# EAGLE board RedBot_Line_Sensor-Panel-v11a (EAGLE 6.6.0)
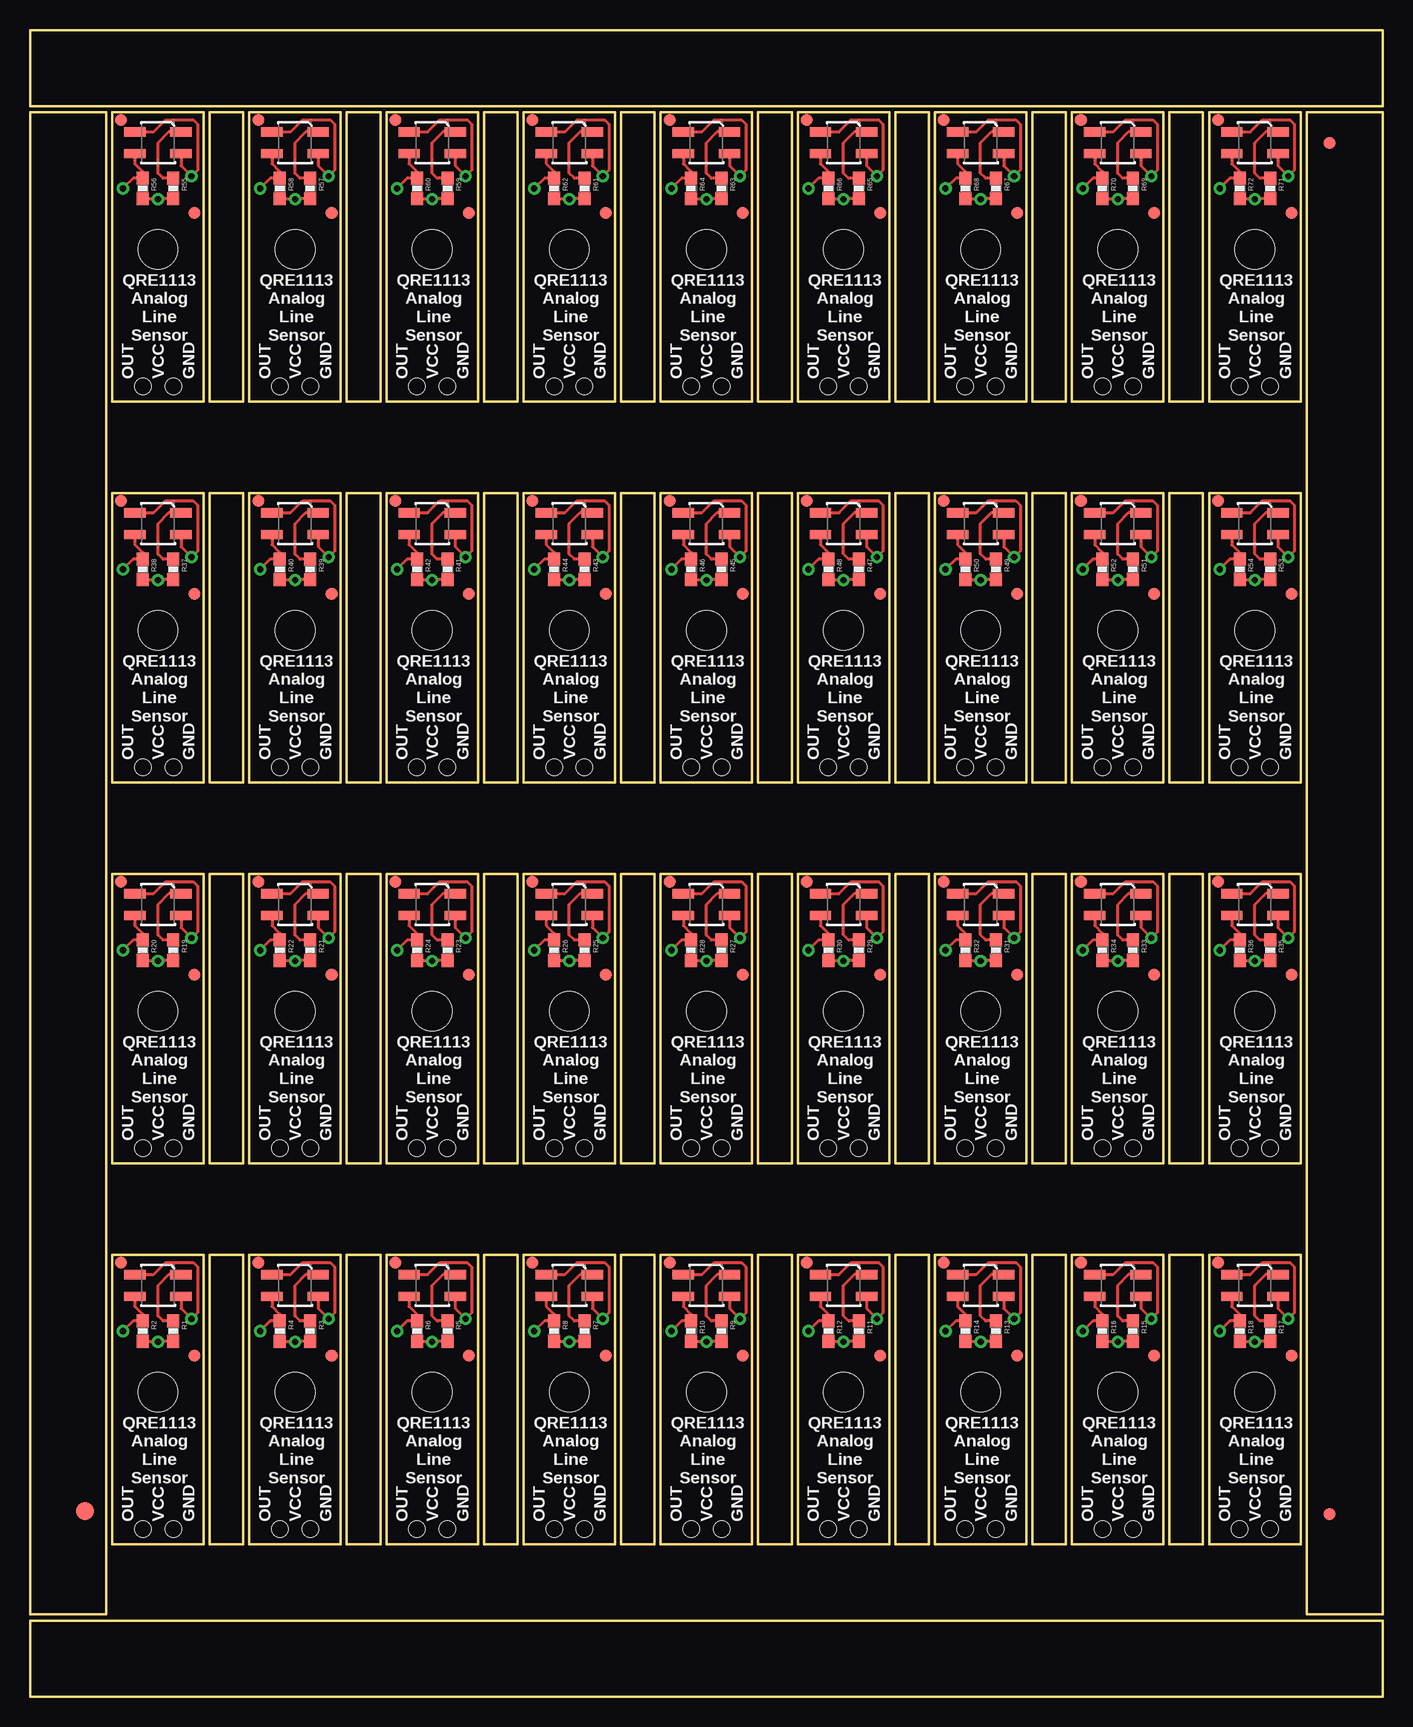
[diagram p0: board, top side]
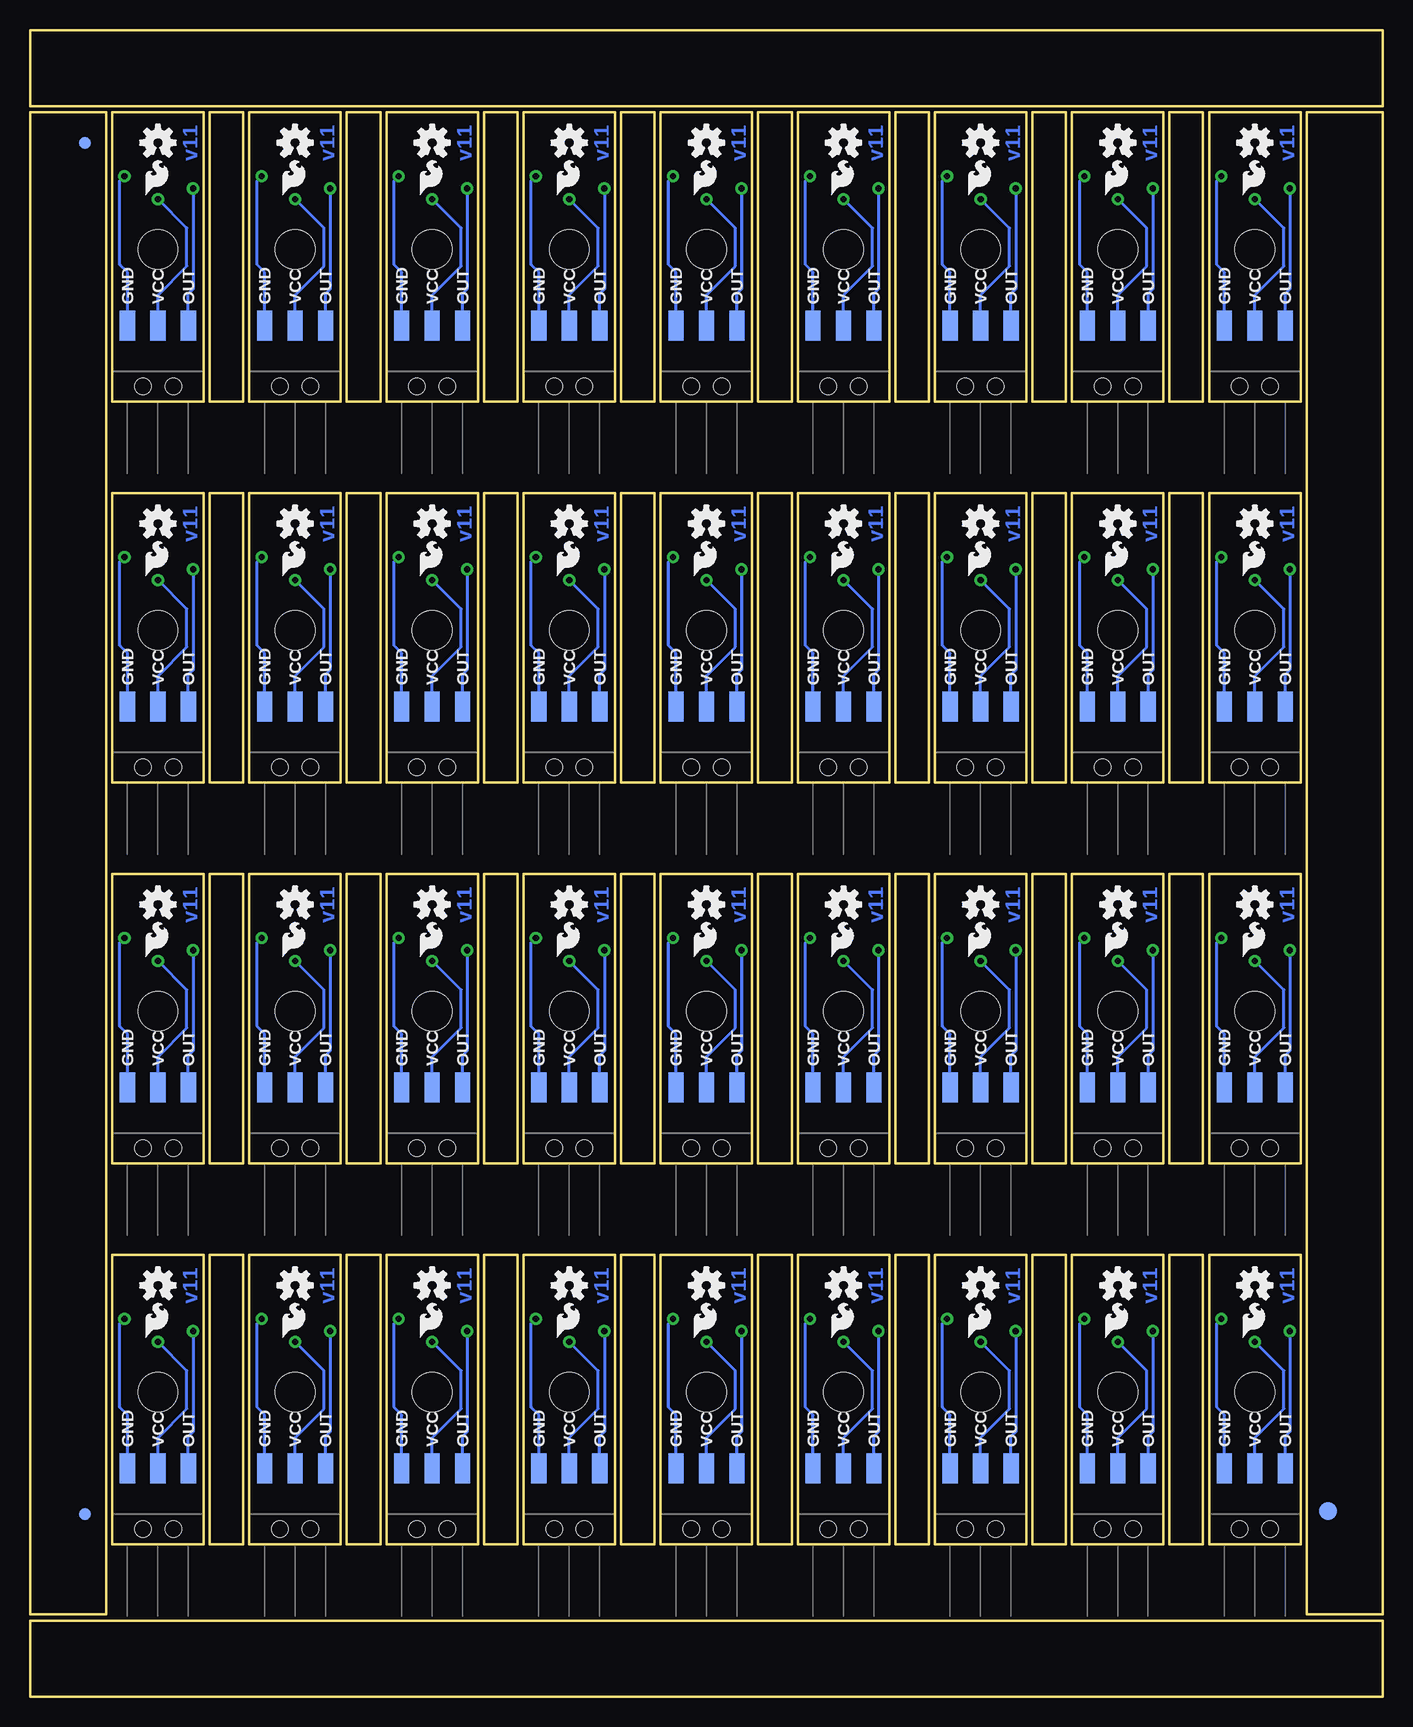
[diagram p1: board, bottom side, seen from below]

Size 112.78 x 138.94 mm. Coordinates in mm from the lower left corner, seen from the top.
Outline: 288 segments
Copper layers (1*16): Top 0.035mm / dielectric 1.5mm / Bottom 0.035mm
Design rules "SparkFun-2-layer": minimum track width 7mil, minimum drill 15mil, track to track 8mil, track to pad 8mil, pad to pad 8mil, via to via 8mil, smd to smd 8mil, copper to edge 8mil, drill to drill 8mil, minimum pad ring 12mil, minimum via ring 10mil, stop-mask expansion 4mil, vias tented up to drill 20mil, thermal gap 10mil

## Footprints (pad centres in the part's own frame; a part is rotated, then mirrored left to right if it is on the bottom)
FIDUCIAL-1.5X3 = smd 1.5 x 1.5: 1 0,0
FIDUCIAL-1X2 = smd 1 x 1: 1 0,0
1X03_SMD_RA_MALE_POST_SMALLER = smd 1.27 x 2.5: 1 -2.54,5.07; 2 0,5.07; 3 2.54,5.07 | hole 1.359: -1.27,0; 1.27,0
0603-RES = smd 1.1 x 1: 1 -0.85,0; 2 0.85,0
STAND-OFF = hole 3.302: 0,0
QRE1113-W = smd 1.778 x 0.762: 1 -1.927,-0.9; 2 1.927,-0.9; 3 1.927,0.9; 4 -1.927,0.9

## Placement (x,y rotation side)
E$1  [FIDUCIAL-1.5X3]  4.57,15.49 0 top
E$2  [FIDUCIAL-1X2]  108.33,15.24 0 top
E$3  [FIDUCIAL-1.5X3]  4.57,15.49 0 bottom
E$4  [FIDUCIAL-1X2]  108.33,129.54 180 top
E$5  [FIDUCIAL-1X2]  108.2,15.24 0 bottom
E$6  [FIDUCIAL-1X2]  108.2,129.54 0 bottom
FID1  FIDUCIAL1X2  [FIDUCIAL-1X2]  7.59,36.2 0 top
FID2  FIDUCIAL1X2  [FIDUCIAL-1X2]  13.72,28.45 0 top
FID3  FIDUCIAL1X2  [FIDUCIAL-1X2]  19.02,36.2 0 top
FID4  FIDUCIAL1X2  [FIDUCIAL-1X2]  25.15,28.45 0 top
FID5  FIDUCIAL1X2  [FIDUCIAL-1X2]  30.45,36.2 0 top
FID6  FIDUCIAL1X2  [FIDUCIAL-1X2]  36.58,28.45 0 top
FID7  FIDUCIAL1X2  [FIDUCIAL-1X2]  41.88,36.2 0 top
FID8  FIDUCIAL1X2  [FIDUCIAL-1X2]  48.01,28.45 0 top
FID9  FIDUCIAL1X2  [FIDUCIAL-1X2]  53.31,36.2 0 top
FID10  FIDUCIAL1X2  [FIDUCIAL-1X2]  59.44,28.45 0 top
FID11  FIDUCIAL1X2  [FIDUCIAL-1X2]  64.74,36.2 0 top
FID12  FIDUCIAL1X2  [FIDUCIAL-1X2]  70.87,28.45 0 top
FID13  FIDUCIAL1X2  [FIDUCIAL-1X2]  76.17,36.2 0 top
FID14  FIDUCIAL1X2  [FIDUCIAL-1X2]  82.3,28.45 0 top
FID15  FIDUCIAL1X2  [FIDUCIAL-1X2]  87.6,36.2 0 top
FID16  FIDUCIAL1X2  [FIDUCIAL-1X2]  93.73,28.45 0 top
FID17  FIDUCIAL1X2  [FIDUCIAL-1X2]  99.03,36.2 0 top
FID18  FIDUCIAL1X2  [FIDUCIAL-1X2]  105.16,28.45 0 top
FID19  FIDUCIAL1X2  [FIDUCIAL-1X2]  7.59,67.94 0 top
FID20  FIDUCIAL1X2  [FIDUCIAL-1X2]  13.72,60.2 0 top
FID21  FIDUCIAL1X2  [FIDUCIAL-1X2]  19.02,67.94 0 top
FID22  FIDUCIAL1X2  [FIDUCIAL-1X2]  25.15,60.2 0 top
FID23  FIDUCIAL1X2  [FIDUCIAL-1X2]  30.45,67.94 0 top
FID24  FIDUCIAL1X2  [FIDUCIAL-1X2]  36.58,60.2 0 top
FID25  FIDUCIAL1X2  [FIDUCIAL-1X2]  41.88,67.94 0 top
FID26  FIDUCIAL1X2  [FIDUCIAL-1X2]  48.01,60.2 0 top
FID27  FIDUCIAL1X2  [FIDUCIAL-1X2]  53.31,67.94 0 top
FID28  FIDUCIAL1X2  [FIDUCIAL-1X2]  59.44,60.2 0 top
FID29  FIDUCIAL1X2  [FIDUCIAL-1X2]  64.74,67.94 0 top
FID30  FIDUCIAL1X2  [FIDUCIAL-1X2]  70.87,60.2 0 top
FID31  FIDUCIAL1X2  [FIDUCIAL-1X2]  76.17,67.94 0 top
FID32  FIDUCIAL1X2  [FIDUCIAL-1X2]  82.3,60.2 0 top
FID33  FIDUCIAL1X2  [FIDUCIAL-1X2]  87.6,67.94 0 top
FID34  FIDUCIAL1X2  [FIDUCIAL-1X2]  93.73,60.2 0 top
FID35  FIDUCIAL1X2  [FIDUCIAL-1X2]  99.03,67.94 0 top
FID36  FIDUCIAL1X2  [FIDUCIAL-1X2]  105.16,60.2 0 top
FID37  FIDUCIAL1X2  [FIDUCIAL-1X2]  7.59,99.69 0 top
FID38  FIDUCIAL1X2  [FIDUCIAL-1X2]  13.72,91.95 0 top
FID39  FIDUCIAL1X2  [FIDUCIAL-1X2]  19.02,99.69 0 top
FID40  FIDUCIAL1X2  [FIDUCIAL-1X2]  25.15,91.95 0 top
FID41  FIDUCIAL1X2  [FIDUCIAL-1X2]  30.45,99.69 0 top
FID42  FIDUCIAL1X2  [FIDUCIAL-1X2]  36.58,91.95 0 top
FID43  FIDUCIAL1X2  [FIDUCIAL-1X2]  41.88,99.69 0 top
FID44  FIDUCIAL1X2  [FIDUCIAL-1X2]  48.01,91.95 0 top
FID45  FIDUCIAL1X2  [FIDUCIAL-1X2]  53.31,99.69 0 top
FID46  FIDUCIAL1X2  [FIDUCIAL-1X2]  59.44,91.95 0 top
FID47  FIDUCIAL1X2  [FIDUCIAL-1X2]  64.74,99.69 0 top
FID48  FIDUCIAL1X2  [FIDUCIAL-1X2]  70.87,91.95 0 top
FID49  FIDUCIAL1X2  [FIDUCIAL-1X2]  76.17,99.69 0 top
FID50  FIDUCIAL1X2  [FIDUCIAL-1X2]  82.3,91.95 0 top
FID51  FIDUCIAL1X2  [FIDUCIAL-1X2]  87.6,99.69 0 top
FID52  FIDUCIAL1X2  [FIDUCIAL-1X2]  93.73,91.95 0 top
FID53  FIDUCIAL1X2  [FIDUCIAL-1X2]  99.03,99.69 0 top
FID54  FIDUCIAL1X2  [FIDUCIAL-1X2]  105.16,91.95 0 top
FID55  FIDUCIAL1X2  [FIDUCIAL-1X2]  7.59,131.44 0 top
FID56  FIDUCIAL1X2  [FIDUCIAL-1X2]  13.72,123.7 0 top
FID57  FIDUCIAL1X2  [FIDUCIAL-1X2]  19.02,131.44 0 top
FID58  FIDUCIAL1X2  [FIDUCIAL-1X2]  25.15,123.7 0 top
FID59  FIDUCIAL1X2  [FIDUCIAL-1X2]  30.45,131.44 0 top
FID60  FIDUCIAL1X2  [FIDUCIAL-1X2]  36.58,123.7 0 top
FID61  FIDUCIAL1X2  [FIDUCIAL-1X2]  41.88,131.44 0 top
FID62  FIDUCIAL1X2  [FIDUCIAL-1X2]  48.01,123.7 0 top
FID63  FIDUCIAL1X2  [FIDUCIAL-1X2]  53.31,131.44 0 top
FID64  FIDUCIAL1X2  [FIDUCIAL-1X2]  59.44,123.7 0 top
FID65  FIDUCIAL1X2  [FIDUCIAL-1X2]  64.74,131.44 0 top
FID66  FIDUCIAL1X2  [FIDUCIAL-1X2]  70.87,123.7 0 top
FID67  FIDUCIAL1X2  [FIDUCIAL-1X2]  76.17,131.44 0 top
FID68  FIDUCIAL1X2  [FIDUCIAL-1X2]  82.3,123.7 0 top
FID69  FIDUCIAL1X2  [FIDUCIAL-1X2]  87.6,131.44 0 top
FID70  FIDUCIAL1X2  [FIDUCIAL-1X2]  93.73,123.7 0 top
FID71  FIDUCIAL1X2  [FIDUCIAL-1X2]  99.03,131.44 0 top
FID72  FIDUCIAL1X2  [FIDUCIAL-1X2]  105.16,123.7 0 top
JP1  [1X03_SMD_RA_MALE_POST_SMALLER]  10.67,13.97 0 bottom
JP2  [1X03_SMD_RA_MALE_POST_SMALLER]  22.1,13.97 0 bottom
JP3  [1X03_SMD_RA_MALE_POST_SMALLER]  33.53,13.97 0 bottom
JP4  [1X03_SMD_RA_MALE_POST_SMALLER]  44.96,13.97 0 bottom
JP5  [1X03_SMD_RA_MALE_POST_SMALLER]  56.39,13.97 0 bottom
JP6  [1X03_SMD_RA_MALE_POST_SMALLER]  67.82,13.97 0 bottom
JP7  [1X03_SMD_RA_MALE_POST_SMALLER]  79.25,13.97 0 bottom
JP8  [1X03_SMD_RA_MALE_POST_SMALLER]  90.68,13.97 0 bottom
JP9  [1X03_SMD_RA_MALE_POST_SMALLER]  102.11,13.97 0 bottom
JP10  [1X03_SMD_RA_MALE_POST_SMALLER]  10.67,45.72 0 bottom
JP11  [1X03_SMD_RA_MALE_POST_SMALLER]  22.1,45.72 0 bottom
JP12  [1X03_SMD_RA_MALE_POST_SMALLER]  33.53,45.72 0 bottom
JP13  [1X03_SMD_RA_MALE_POST_SMALLER]  44.96,45.72 0 bottom
JP14  [1X03_SMD_RA_MALE_POST_SMALLER]  56.39,45.72 0 bottom
JP15  [1X03_SMD_RA_MALE_POST_SMALLER]  67.82,45.72 0 bottom
JP16  [1X03_SMD_RA_MALE_POST_SMALLER]  79.25,45.72 0 bottom
JP17  [1X03_SMD_RA_MALE_POST_SMALLER]  90.68,45.72 0 bottom
JP18  [1X03_SMD_RA_MALE_POST_SMALLER]  102.11,45.72 0 bottom
JP19  [1X03_SMD_RA_MALE_POST_SMALLER]  10.67,77.47 0 bottom
JP20  [1X03_SMD_RA_MALE_POST_SMALLER]  22.1,77.47 0 bottom
JP21  [1X03_SMD_RA_MALE_POST_SMALLER]  33.53,77.47 0 bottom
JP22  [1X03_SMD_RA_MALE_POST_SMALLER]  44.96,77.47 0 bottom
JP23  [1X03_SMD_RA_MALE_POST_SMALLER]  56.39,77.47 0 bottom
JP24  [1X03_SMD_RA_MALE_POST_SMALLER]  67.82,77.47 0 bottom
JP25  [1X03_SMD_RA_MALE_POST_SMALLER]  79.25,77.47 0 bottom
JP26  [1X03_SMD_RA_MALE_POST_SMALLER]  90.68,77.47 0 bottom
JP27  [1X03_SMD_RA_MALE_POST_SMALLER]  102.11,77.47 0 bottom
JP28  [1X03_SMD_RA_MALE_POST_SMALLER]  10.67,109.22 0 bottom
JP29  [1X03_SMD_RA_MALE_POST_SMALLER]  22.1,109.22 0 bottom
JP30  [1X03_SMD_RA_MALE_POST_SMALLER]  33.53,109.22 0 bottom
JP31  [1X03_SMD_RA_MALE_POST_SMALLER]  44.96,109.22 0 bottom
JP32  [1X03_SMD_RA_MALE_POST_SMALLER]  56.39,109.22 0 bottom
JP33  [1X03_SMD_RA_MALE_POST_SMALLER]  67.82,109.22 0 bottom
JP34  [1X03_SMD_RA_MALE_POST_SMALLER]  79.25,109.22 0 bottom
JP35  [1X03_SMD_RA_MALE_POST_SMALLER]  90.68,109.22 0 bottom
JP36  [1X03_SMD_RA_MALE_POST_SMALLER]  102.11,109.22 0 bottom
LOGO1  OSHW-LOGOS  [OSHW-LOGO-S]  22.1,34.29 0 bottom
LOGO2  OSHW-LOGOS  [OSHW-LOGO-S]  10.67,34.29 0 bottom
LOGO3  LOGO-SFESK  [SFE-LOGO-FLAME]  11.68,29.97 0 bottom
LOGO4  LOGO-SFESK  [SFE-LOGO-FLAME]  23.11,29.97 0 bottom
LOGO5  OSHW-LOGOS  [OSHW-LOGO-S]  33.53,34.29 0 bottom
LOGO6  LOGO-SFESK  [SFE-LOGO-FLAME]  34.54,29.97 0 bottom
LOGO7  OSHW-LOGOS  [OSHW-LOGO-S]  44.96,34.29 0 bottom
LOGO8  LOGO-SFESK  [SFE-LOGO-FLAME]  45.97,29.97 0 bottom
LOGO9  OSHW-LOGOS  [OSHW-LOGO-S]  56.39,34.29 0 bottom
LOGO10  LOGO-SFESK  [SFE-LOGO-FLAME]  57.4,29.97 0 bottom
LOGO11  OSHW-LOGOS  [OSHW-LOGO-S]  67.82,34.29 0 bottom
LOGO12  LOGO-SFESK  [SFE-LOGO-FLAME]  68.83,29.97 0 bottom
LOGO13  OSHW-LOGOS  [OSHW-LOGO-S]  79.25,34.29 0 bottom
LOGO14  LOGO-SFESK  [SFE-LOGO-FLAME]  80.26,29.97 0 bottom
LOGO15  OSHW-LOGOS  [OSHW-LOGO-S]  90.68,34.29 0 bottom
LOGO16  LOGO-SFESK  [SFE-LOGO-FLAME]  91.69,29.97 0 bottom
LOGO17  OSHW-LOGOS  [OSHW-LOGO-S]  102.11,34.29 0 bottom
LOGO18  LOGO-SFESK  [SFE-LOGO-FLAME]  103.12,29.97 0 bottom
LOGO19  OSHW-LOGOS  [OSHW-LOGO-S]  10.67,66.04 0 bottom
LOGO20  LOGO-SFESK  [SFE-LOGO-FLAME]  11.68,61.72 0 bottom
LOGO21  OSHW-LOGOS  [OSHW-LOGO-S]  22.1,66.04 0 bottom
LOGO22  LOGO-SFESK  [SFE-LOGO-FLAME]  23.11,61.72 0 bottom
LOGO23  OSHW-LOGOS  [OSHW-LOGO-S]  33.53,66.04 0 bottom
LOGO24  LOGO-SFESK  [SFE-LOGO-FLAME]  34.54,61.72 0 bottom
LOGO25  OSHW-LOGOS  [OSHW-LOGO-S]  44.96,66.04 0 bottom
LOGO26  LOGO-SFESK  [SFE-LOGO-FLAME]  45.97,61.72 0 bottom
LOGO27  OSHW-LOGOS  [OSHW-LOGO-S]  56.39,66.04 0 bottom
LOGO28  LOGO-SFESK  [SFE-LOGO-FLAME]  57.4,61.72 0 bottom
LOGO29  OSHW-LOGOS  [OSHW-LOGO-S]  67.82,66.04 0 bottom
LOGO30  LOGO-SFESK  [SFE-LOGO-FLAME]  68.83,61.72 0 bottom
LOGO31  OSHW-LOGOS  [OSHW-LOGO-S]  79.25,66.04 0 bottom
LOGO32  LOGO-SFESK  [SFE-LOGO-FLAME]  80.26,61.72 0 bottom
LOGO33  OSHW-LOGOS  [OSHW-LOGO-S]  90.68,66.04 0 bottom
LOGO34  LOGO-SFESK  [SFE-LOGO-FLAME]  91.69,61.72 0 bottom
LOGO35  OSHW-LOGOS  [OSHW-LOGO-S]  102.11,66.04 0 bottom
LOGO36  LOGO-SFESK  [SFE-LOGO-FLAME]  103.12,61.72 0 bottom
LOGO37  OSHW-LOGOS  [OSHW-LOGO-S]  10.67,97.79 0 bottom
LOGO38  LOGO-SFESK  [SFE-LOGO-FLAME]  11.68,93.47 0 bottom
LOGO39  OSHW-LOGOS  [OSHW-LOGO-S]  22.1,97.79 0 bottom
LOGO40  LOGO-SFESK  [SFE-LOGO-FLAME]  23.11,93.47 0 bottom
LOGO41  OSHW-LOGOS  [OSHW-LOGO-S]  33.53,97.79 0 bottom
LOGO42  LOGO-SFESK  [SFE-LOGO-FLAME]  34.54,93.47 0 bottom
LOGO43  OSHW-LOGOS  [OSHW-LOGO-S]  44.96,97.79 0 bottom
LOGO44  LOGO-SFESK  [SFE-LOGO-FLAME]  45.97,93.47 0 bottom
LOGO45  OSHW-LOGOS  [OSHW-LOGO-S]  56.39,97.79 0 bottom
LOGO46  LOGO-SFESK  [SFE-LOGO-FLAME]  57.4,93.47 0 bottom
LOGO47  OSHW-LOGOS  [OSHW-LOGO-S]  67.82,97.79 0 bottom
LOGO48  LOGO-SFESK  [SFE-LOGO-FLAME]  68.83,93.47 0 bottom
LOGO49  OSHW-LOGOS  [OSHW-LOGO-S]  79.25,97.79 0 bottom
LOGO50  LOGO-SFESK  [SFE-LOGO-FLAME]  80.26,93.47 0 bottom
LOGO51  OSHW-LOGOS  [OSHW-LOGO-S]  90.68,97.79 0 bottom
LOGO52  LOGO-SFESK  [SFE-LOGO-FLAME]  91.69,93.47 0 bottom
LOGO53  OSHW-LOGOS  [OSHW-LOGO-S]  102.11,97.79 0 bottom
LOGO54  LOGO-SFESK  [SFE-LOGO-FLAME]  103.12,93.47 0 bottom
LOGO55  OSHW-LOGOS  [OSHW-LOGO-S]  10.67,129.54 0 bottom
LOGO56  LOGO-SFESK  [SFE-LOGO-FLAME]  11.68,125.22 0 bottom
LOGO57  OSHW-LOGOS  [OSHW-LOGO-S]  22.1,129.54 0 bottom
LOGO58  LOGO-SFESK  [SFE-LOGO-FLAME]  23.11,125.22 0 bottom
LOGO59  OSHW-LOGOS  [OSHW-LOGO-S]  33.53,129.54 0 bottom
LOGO60  LOGO-SFESK  [SFE-LOGO-FLAME]  34.54,125.22 0 bottom
LOGO61  OSHW-LOGOS  [OSHW-LOGO-S]  44.96,129.54 0 bottom
LOGO62  LOGO-SFESK  [SFE-LOGO-FLAME]  45.97,125.22 0 bottom
LOGO63  OSHW-LOGOS  [OSHW-LOGO-S]  56.39,129.54 0 bottom
LOGO64  LOGO-SFESK  [SFE-LOGO-FLAME]  57.4,125.22 0 bottom
LOGO65  OSHW-LOGOS  [OSHW-LOGO-S]  67.82,129.54 0 bottom
LOGO66  LOGO-SFESK  [SFE-LOGO-FLAME]  68.83,125.22 0 bottom
LOGO67  OSHW-LOGOS  [OSHW-LOGO-S]  79.25,129.54 0 bottom
LOGO68  LOGO-SFESK  [SFE-LOGO-FLAME]  80.26,125.22 0 bottom
LOGO69  OSHW-LOGOS  [OSHW-LOGO-S]  90.68,129.54 0 bottom
LOGO70  LOGO-SFESK  [SFE-LOGO-FLAME]  91.69,125.22 0 bottom
LOGO71  OSHW-LOGOS  [OSHW-LOGO-S]  102.11,129.54 0 bottom
LOGO72  LOGO-SFESK  [SFE-LOGO-FLAME]  103.12,125.22 0 bottom
R1  100  [0603-RES]  11.94,30.48 270 top
R2  10k  [0603-RES]  9.4,30.48 270 top
R3  100  [0603-RES]  23.37,30.48 270 top
R4  10k  [0603-RES]  20.83,30.48 270 top
R5  100  [0603-RES]  34.8,30.48 270 top
R6  10k  [0603-RES]  32.26,30.48 270 top
R7  100  [0603-RES]  46.23,30.48 270 top
R8  10k  [0603-RES]  43.69,30.48 270 top
R9  100  [0603-RES]  57.66,30.48 270 top
R10  10k  [0603-RES]  55.12,30.48 270 top
R11  100  [0603-RES]  69.09,30.48 270 top
R12  10k  [0603-RES]  66.55,30.48 270 top
R13  100  [0603-RES]  80.52,30.48 270 top
R14  10k  [0603-RES]  77.98,30.48 270 top
R15  100  [0603-RES]  91.95,30.48 270 top
R16  10k  [0603-RES]  89.41,30.48 270 top
R17  100  [0603-RES]  103.38,30.48 270 top
R18  10k  [0603-RES]  100.84,30.48 270 top
R19  100  [0603-RES]  11.94,62.23 270 top
R20  10k  [0603-RES]  9.4,62.23 270 top
R21  100  [0603-RES]  23.37,62.23 270 top
R22  10k  [0603-RES]  20.83,62.23 270 top
R23  100  [0603-RES]  34.8,62.23 270 top
R24  10k  [0603-RES]  32.26,62.23 270 top
R25  100  [0603-RES]  46.23,62.23 270 top
R26  10k  [0603-RES]  43.69,62.23 270 top
R27  100  [0603-RES]  57.66,62.23 270 top
R28  10k  [0603-RES]  55.12,62.23 270 top
R29  100  [0603-RES]  69.09,62.23 270 top
R30  10k  [0603-RES]  66.55,62.23 270 top
R31  100  [0603-RES]  80.52,62.23 270 top
R32  10k  [0603-RES]  77.98,62.23 270 top
R33  100  [0603-RES]  91.95,62.23 270 top
R34  10k  [0603-RES]  89.41,62.23 270 top
R35  100  [0603-RES]  103.38,62.23 270 top
R36  10k  [0603-RES]  100.84,62.23 270 top
R37  100  [0603-RES]  11.94,93.98 270 top
R38  10k  [0603-RES]  9.4,93.98 270 top
R39  100  [0603-RES]  23.37,93.98 270 top
R40  10k  [0603-RES]  20.83,93.98 270 top
R41  100  [0603-RES]  34.8,93.98 270 top
R42  10k  [0603-RES]  32.26,93.98 270 top
R43  100  [0603-RES]  46.23,93.98 270 top
R44  10k  [0603-RES]  43.69,93.98 270 top
R45  100  [0603-RES]  57.66,93.98 270 top
R46  10k  [0603-RES]  55.12,93.98 270 top
R47  100  [0603-RES]  69.09,93.98 270 top
R48  10k  [0603-RES]  66.55,93.98 270 top
R49  100  [0603-RES]  80.52,93.98 270 top
R50  10k  [0603-RES]  77.98,93.98 270 top
R51  100  [0603-RES]  91.95,93.98 270 top
R52  10k  [0603-RES]  89.41,93.98 270 top
R53  100  [0603-RES]  103.38,93.98 270 top
R54  10k  [0603-RES]  100.84,93.98 270 top
R55  100  [0603-RES]  11.94,125.73 270 top
R56  10k  [0603-RES]  9.4,125.73 270 top
R57  100  [0603-RES]  23.37,125.73 270 top
R58  10k  [0603-RES]  20.83,125.73 270 top
R59  100  [0603-RES]  34.8,125.73 270 top
R60  10k  [0603-RES]  32.26,125.73 270 top
R61  100  [0603-RES]  46.23,125.73 270 top
R62  10k  [0603-RES]  43.69,125.73 270 top
R63  100  [0603-RES]  57.66,125.73 270 top
R64  10k  [0603-RES]  55.12,125.73 270 top
R65  100  [0603-RES]  69.09,125.73 270 top
R66  10k  [0603-RES]  66.55,125.73 270 top
R67  100  [0603-RES]  80.52,125.73 270 top
R68  10k  [0603-RES]  77.98,125.73 270 top
R69  100  [0603-RES]  91.95,125.73 270 top
R70  10k  [0603-RES]  89.41,125.73 270 top
R71  100  [0603-RES]  103.38,125.73 270 top
R72  10k  [0603-RES]  100.84,125.73 270 top
STANDOFF1  STAND-OFF  [STAND-OFF]  10.67,25.4 0 top
STANDOFF2  STAND-OFF  [STAND-OFF]  22.1,25.4 0 top
STANDOFF3  STAND-OFF  [STAND-OFF]  33.53,25.4 0 top
STANDOFF4  STAND-OFF  [STAND-OFF]  44.96,25.4 0 top
STANDOFF5  STAND-OFF  [STAND-OFF]  56.39,25.4 0 top
STANDOFF6  STAND-OFF  [STAND-OFF]  67.82,25.4 0 top
STANDOFF7  STAND-OFF  [STAND-OFF]  79.25,25.4 0 top
STANDOFF8  STAND-OFF  [STAND-OFF]  90.68,25.4 0 top
STANDOFF9  STAND-OFF  [STAND-OFF]  102.11,25.4 0 top
STANDOFF10  STAND-OFF  [STAND-OFF]  10.67,57.15 0 top
STANDOFF11  STAND-OFF  [STAND-OFF]  22.1,57.15 0 top
STANDOFF12  STAND-OFF  [STAND-OFF]  33.53,57.15 0 top
STANDOFF13  STAND-OFF  [STAND-OFF]  44.96,57.15 0 top
STANDOFF14  STAND-OFF  [STAND-OFF]  56.39,57.15 0 top
STANDOFF15  STAND-OFF  [STAND-OFF]  67.82,57.15 0 top
STANDOFF16  STAND-OFF  [STAND-OFF]  79.25,57.15 0 top
STANDOFF17  STAND-OFF  [STAND-OFF]  90.68,57.15 0 top
STANDOFF18  STAND-OFF  [STAND-OFF]  102.11,57.15 0 top
STANDOFF19  STAND-OFF  [STAND-OFF]  10.67,88.9 0 top
STANDOFF20  STAND-OFF  [STAND-OFF]  22.1,88.9 0 top
STANDOFF21  STAND-OFF  [STAND-OFF]  33.53,88.9 0 top
STANDOFF22  STAND-OFF  [STAND-OFF]  44.96,88.9 0 top
STANDOFF23  STAND-OFF  [STAND-OFF]  56.39,88.9 0 top
STANDOFF24  STAND-OFF  [STAND-OFF]  67.82,88.9 0 top
STANDOFF25  STAND-OFF  [STAND-OFF]  79.25,88.9 0 top
STANDOFF26  STAND-OFF  [STAND-OFF]  90.68,88.9 0 top
STANDOFF27  STAND-OFF  [STAND-OFF]  102.11,88.9 0 top
STANDOFF28  STAND-OFF  [STAND-OFF]  10.67,120.65 0 top
STANDOFF29  STAND-OFF  [STAND-OFF]  22.1,120.65 0 top
STANDOFF30  STAND-OFF  [STAND-OFF]  33.53,120.65 0 top
STANDOFF31  STAND-OFF  [STAND-OFF]  44.96,120.65 0 top
STANDOFF32  STAND-OFF  [STAND-OFF]  56.39,120.65 0 top
STANDOFF33  STAND-OFF  [STAND-OFF]  67.82,120.65 0 top
STANDOFF34  STAND-OFF  [STAND-OFF]  79.25,120.65 0 top
STANDOFF35  STAND-OFF  [STAND-OFF]  90.68,120.65 0 top
STANDOFF36  STAND-OFF  [STAND-OFF]  102.11,120.65 0 top
U1  QRE1113SMD-W  [QRE1113-W]  10.67,34.29 180 top
U2  QRE1113SMD-W  [QRE1113-W]  22.1,34.29 180 top
U3  QRE1113SMD-W  [QRE1113-W]  33.53,34.29 180 top
U4  QRE1113SMD-W  [QRE1113-W]  44.96,34.29 180 top
U5  QRE1113SMD-W  [QRE1113-W]  56.39,34.29 180 top
U6  QRE1113SMD-W  [QRE1113-W]  67.82,34.29 180 top
U7  QRE1113SMD-W  [QRE1113-W]  79.25,34.29 180 top
U8  QRE1113SMD-W  [QRE1113-W]  90.68,34.29 180 top
U9  QRE1113SMD-W  [QRE1113-W]  102.11,34.29 180 top
U10  QRE1113SMD-W  [QRE1113-W]  10.67,66.04 180 top
U11  QRE1113SMD-W  [QRE1113-W]  22.1,66.04 180 top
U12  QRE1113SMD-W  [QRE1113-W]  33.53,66.04 180 top
U13  QRE1113SMD-W  [QRE1113-W]  44.96,66.04 180 top
U14  QRE1113SMD-W  [QRE1113-W]  56.39,66.04 180 top
U15  QRE1113SMD-W  [QRE1113-W]  67.82,66.04 180 top
U16  QRE1113SMD-W  [QRE1113-W]  79.25,66.04 180 top
U17  QRE1113SMD-W  [QRE1113-W]  90.68,66.04 180 top
U18  QRE1113SMD-W  [QRE1113-W]  102.11,66.04 180 top
U19  QRE1113SMD-W  [QRE1113-W]  10.67,97.79 180 top
U20  QRE1113SMD-W  [QRE1113-W]  22.1,97.79 180 top
U21  QRE1113SMD-W  [QRE1113-W]  33.53,97.79 180 top
U22  QRE1113SMD-W  [QRE1113-W]  44.96,97.79 180 top
U23  QRE1113SMD-W  [QRE1113-W]  56.39,97.79 180 top
U24  QRE1113SMD-W  [QRE1113-W]  67.82,97.79 180 top
U25  QRE1113SMD-W  [QRE1113-W]  79.25,97.79 180 top
U26  QRE1113SMD-W  [QRE1113-W]  90.68,97.79 180 top
U27  QRE1113SMD-W  [QRE1113-W]  102.11,97.79 180 top
U28  QRE1113SMD-W  [QRE1113-W]  10.67,129.54 180 top
U29  QRE1113SMD-W  [QRE1113-W]  22.1,129.54 180 top
U30  QRE1113SMD-W  [QRE1113-W]  33.53,129.54 180 top
U31  QRE1113SMD-W  [QRE1113-W]  44.96,129.54 180 top
U32  QRE1113SMD-W  [QRE1113-W]  56.39,129.54 180 top
U33  QRE1113SMD-W  [QRE1113-W]  67.82,129.54 180 top
U34  QRE1113SMD-W  [QRE1113-W]  79.25,129.54 180 top
U35  QRE1113SMD-W  [QRE1113-W]  90.68,129.54 180 top
U36  QRE1113SMD-W  [QRE1113-W]  102.11,129.54 180 top

## Library data of the parts
E$1 E$3 = SparkFun-Retired
E$2 E$4-E$6 FID1-FID72 LOGO1-LOGO72 = SparkFun-Aesthetics
JP1-JP36 = SparkFun-Connectors
R1 R3 R5 R7 R9 R11 R13 R15 R17 R19 R21 R23 R25 R27 R29 R31 R33 R35 R37 R39 R41 R43 R45 R47 R49 R51 R53 R55 R57 R59 R61 R63 R65 R67 R69 R71 = SparkFun-Resistors; PROD_ID: RES-07863
R2 R4 R6 R8 R10 R12 R14 R16 R18 R20 R22 R24 R26 R28 R30 R32 R34 R36 R38 R40 R42 R44 R46 R48 R50 R52 R54 R56 R58 R60 R62 R64 R66 R68 R70 R72 = SparkFun-Resistors; PROD_ID: RES-00824
STANDOFF1-STANDOFF36 = SparkFun-Electromechanical
U1-U36 = SparkFun-Sensors

## Nets
5V: JP1.2 R1.2 R2.2
5V1: JP2.2 R3.2 R4.2
5V2: JP3.2 R5.2 R6.2
5V3: JP4.2 R7.2 R8.2
5V4: JP5.2 R9.2 R10.2
5V5: JP6.2 R11.2 R12.2
5V6: JP7.2 R13.2 R14.2
5V7: JP8.2 R15.2 R16.2
5V8: JP9.2 R17.2 R18.2
5V9: JP10.2 R19.2 R20.2
5V10: JP11.2 R21.2 R22.2
5V11: JP12.2 R23.2 R24.2
5V12: JP13.2 R25.2 R26.2
5V13: JP14.2 R27.2 R28.2
5V14: JP15.2 R29.2 R30.2
5V15: JP16.2 R31.2 R32.2
5V16: JP17.2 R33.2 R34.2
5V17: JP18.2 R35.2 R36.2
5V18: JP19.2 R37.2 R38.2
5V19: JP20.2 R39.2 R40.2
5V20: JP21.2 R41.2 R42.2
5V21: JP22.2 R43.2 R44.2
5V22: JP23.2 R45.2 R46.2
5V23: JP24.2 R47.2 R48.2
5V24: JP25.2 R49.2 R50.2
5V25: JP26.2 R51.2 R52.2
5V26: JP27.2 R53.2 R54.2
5V27: JP28.2 R55.2 R56.2
5V28: JP29.2 R57.2 R58.2
5V29: JP30.2 R59.2 R60.2
5V30: JP31.2 R61.2 R62.2
5V31: JP32.2 R63.2 R64.2
5V32: JP33.2 R65.2 R66.2
5V33: JP34.2 R67.2 R68.2
5V34: JP35.2 R69.2 R70.2
5V35: JP36.2 R71.2 R72.2
GND: JP1.1 U1.2 U1.4
GND1: JP2.1 U2.2 U2.4
GND2: JP3.1 U3.2 U3.4
GND3: JP4.1 U4.2 U4.4
GND4: JP5.1 U5.2 U5.4
GND5: JP6.1 U6.2 U6.4
GND6: JP7.1 U7.2 U7.4
GND7: JP8.1 U8.2 U8.4
GND8: JP9.1 U9.2 U9.4
GND9: JP10.1 U10.2 U10.4
GND10: JP11.1 U11.2 U11.4
GND11: JP12.1 U12.2 U12.4
GND12: JP13.1 U13.2 U13.4
GND13: JP14.1 U14.2 U14.4
GND14: JP15.1 U15.2 U15.4
GND15: JP16.1 U16.2 U16.4
GND16: JP17.1 U17.2 U17.4
GND17: JP18.1 U18.2 U18.4
GND18: JP19.1 U19.2 U19.4
GND19: JP20.1 U20.2 U20.4
GND20: JP21.1 U21.2 U21.4
GND21: JP22.1 U22.2 U22.4
GND22: JP23.1 U23.2 U23.4
GND23: JP24.1 U24.2 U24.4
GND24: JP25.1 U25.2 U25.4
GND25: JP26.1 U26.2 U26.4
GND26: JP27.1 U27.2 U27.4
GND27: JP28.1 U28.2 U28.4
GND28: JP29.1 U29.2 U29.4
GND29: JP30.1 U30.2 U30.4
GND30: JP31.1 U31.2 U31.4
GND31: JP32.1 U32.2 U32.4
GND32: JP33.1 U33.2 U33.4
GND33: JP34.1 U34.2 U34.4
GND34: JP35.1 U35.2 U35.4
GND35: JP36.1 U36.2 U36.4
N$1: R1.1 U1.1
N$2: JP1.3 R2.1 U1.3
N$3: R3.1 U2.1
N$4: JP2.3 R4.1 U2.3
N$5: R5.1 U3.1
N$6: JP3.3 R6.1 U3.3
N$7: R7.1 U4.1
N$8: JP4.3 R8.1 U4.3
N$9: R9.1 U5.1
N$10: JP5.3 R10.1 U5.3
N$11: R11.1 U6.1
N$12: JP6.3 R12.1 U6.3
N$13: R13.1 U7.1
N$14: JP7.3 R14.1 U7.3
N$15: R15.1 U8.1
N$16: JP8.3 R16.1 U8.3
N$17: R17.1 U9.1
N$18: JP9.3 R18.1 U9.3
N$19: R19.1 U10.1
N$20: JP10.3 R20.1 U10.3
N$21: R21.1 U11.1
N$22: JP11.3 R22.1 U11.3
N$23: R23.1 U12.1
N$24: JP12.3 R24.1 U12.3
N$25: R25.1 U13.1
N$26: JP13.3 R26.1 U13.3
N$27: R27.1 U14.1
N$28: JP14.3 R28.1 U14.3
N$29: R29.1 U15.1
N$30: JP15.3 R30.1 U15.3
N$31: R31.1 U16.1
N$32: JP16.3 R32.1 U16.3
N$33: R33.1 U17.1
N$34: JP17.3 R34.1 U17.3
N$35: R35.1 U18.1
N$36: JP18.3 R36.1 U18.3
N$37: R37.1 U19.1
N$38: JP19.3 R38.1 U19.3
N$39: R39.1 U20.1
N$40: JP20.3 R40.1 U20.3
N$41: R41.1 U21.1
N$42: JP21.3 R42.1 U21.3
N$43: R43.1 U22.1
N$44: JP22.3 R44.1 U22.3
N$45: R45.1 U23.1
N$46: JP23.3 R46.1 U23.3
N$47: R47.1 U24.1
N$48: JP24.3 R48.1 U24.3
N$49: R49.1 U25.1
N$50: JP25.3 R50.1 U25.3
N$51: R51.1 U26.1
N$52: JP26.3 R52.1 U26.3
N$53: R53.1 U27.1
N$54: JP27.3 R54.1 U27.3
N$55: R55.1 U28.1
N$56: JP28.3 R56.1 U28.3
N$57: R57.1 U29.1
N$58: JP29.3 R58.1 U29.3
N$59: R59.1 U30.1
N$60: JP30.3 R60.1 U30.3
N$61: R61.1 U31.1
N$62: JP31.3 R62.1 U31.3
N$63: R63.1 U32.1
N$64: JP32.3 R64.1 U32.3
N$65: R65.1 U33.1
N$66: JP33.3 R66.1 U33.3
N$67: R67.1 U34.1
N$68: JP34.3 R68.1 U34.3
N$69: R69.1 U35.1
N$70: JP35.3 R70.1 U35.3
N$71: R71.1 U36.1
N$72: JP36.3 R72.1 U36.3

## Tracks (layer width: path | path; a pad name or v marks a point on that pad's centre or on a via)
5V  (via drill 0.51)
  Top 0.254: R2.2 10.63,29.63 v10.67,29.59 10.71,29.63 R1.2
  Bottom 0.254: JP1.2 10.67,21.59 8.26,24 8.26,27.18 v10.67,29.59
5V1  (via drill 0.51)
  Top 0.254: R4.2 22.06,29.63 v22.1,29.59 22.14,29.63 R3.2
  Bottom 0.254: JP2.2 22.1,21.59 19.68,24 19.68,27.18 v22.1,29.59
5V2  (via drill 0.51)
  Top 0.254: R6.2 33.49,29.63 v33.53,29.59 33.57,29.63 R5.2
  Bottom 0.254: JP3.2 33.53,21.59 31.11,24 31.11,27.18 v33.53,29.59
5V3  (via drill 0.51)
  Top 0.254: R8.2 44.92,29.63 v44.96,29.59 45,29.63 R7.2
  Bottom 0.254: JP4.2 44.96,21.59 42.55,24 42.55,27.18 v44.96,29.59
5V4  (via drill 0.51)
  Top 0.254: R10.2 56.35,29.63 v56.39,29.59 56.43,29.63 R9.2
  Bottom 0.254: JP5.2 56.39,21.59 53.98,24 53.98,27.18 v56.39,29.59
5V5  (via drill 0.51)
  Top 0.254: R12.2 67.78,29.63 v67.82,29.59 67.86,29.63 R11.2
  Bottom 0.254: JP6.2 67.82,21.59 65.41,24 65.41,27.18 v67.82,29.59
5V6  (via drill 0.51)
  Top 0.254: R14.2 79.21,29.63 v79.25,29.59 79.29,29.63 R13.2
  Bottom 0.254: JP7.2 79.25,21.59 76.83,24 76.83,27.18 v79.25,29.59
5V7  (via drill 0.51)
  Top 0.254: R16.2 90.64,29.63 v90.68,29.59 90.72,29.63 R15.2
  Bottom 0.254: JP8.2 90.68,21.59 88.27,24 88.27,27.18 v90.68,29.59
5V8  (via drill 0.51)
  Top 0.254: R18.2 102.07,29.63 v102.11,29.59 102.15,29.63 R17.2
  Bottom 0.254: JP9.2 102.11,21.59 99.69,24 99.69,27.18 v102.11,29.59
5V9  (via drill 0.51)
  Top 0.254: R20.2 10.63,61.38 v10.67,61.34 10.71,61.38 R19.2
  Bottom 0.254: JP10.2 10.67,53.34 8.26,55.75 8.26,58.93 v10.67,61.34
5V10  (via drill 0.51)
  Top 0.254: R22.2 22.06,61.38 v22.1,61.34 22.14,61.38 R21.2
  Bottom 0.254: JP11.2 22.1,53.34 19.68,55.75 19.68,58.93 v22.1,61.34
5V11  (via drill 0.51)
  Top 0.254: R24.2 33.49,61.38 v33.53,61.34 33.57,61.38 R23.2
  Bottom 0.254: JP12.2 33.53,53.34 31.11,55.75 31.11,58.93 v33.53,61.34
5V12  (via drill 0.51)
  Top 0.254: R26.2 44.92,61.38 v44.96,61.34 45,61.38 R25.2
  Bottom 0.254: JP13.2 44.96,53.34 42.55,55.75 42.55,58.93 v44.96,61.34
5V13  (via drill 0.51)
  Top 0.254: R28.2 56.35,61.38 v56.39,61.34 56.43,61.38 R27.2
  Bottom 0.254: JP14.2 56.39,53.34 53.98,55.75 53.98,58.93 v56.39,61.34
5V14  (via drill 0.51)
  Top 0.254: R30.2 67.78,61.38 v67.82,61.34 67.86,61.38 R29.2
  Bottom 0.254: JP15.2 67.82,53.34 65.41,55.75 65.41,58.93 v67.82,61.34
5V15  (via drill 0.51)
  Top 0.254: R32.2 79.21,61.38 v79.25,61.34 79.29,61.38 R31.2
  Bottom 0.254: JP16.2 79.25,53.34 76.83,55.75 76.83,58.93 v79.25,61.34
5V16  (via drill 0.51)
  Top 0.254: R34.2 90.64,61.38 v90.68,61.34 90.72,61.38 R33.2
  Bottom 0.254: JP17.2 90.68,53.34 88.27,55.75 88.27,58.93 v90.68,61.34
5V17  (via drill 0.51)
  Top 0.254: R36.2 102.07,61.38 v102.11,61.34 102.15,61.38 R35.2
  Bottom 0.254: JP18.2 102.11,53.34 99.69,55.75 99.69,58.93 v102.11,61.34
5V18  (via drill 0.51)
  Top 0.254: R38.2 10.63,93.13 v10.67,93.09 10.71,93.13 R37.2
  Bottom 0.254: JP19.2 10.67,85.09 8.26,87.5 8.26,90.68 v10.67,93.09
5V19  (via drill 0.51)
  Top 0.254: R40.2 22.06,93.13 v22.1,93.09 22.14,93.13 R39.2
  Bottom 0.254: JP20.2 22.1,85.09 19.68,87.5 19.68,90.68 v22.1,93.09
5V20  (via drill 0.51)
  Top 0.254: R42.2 33.49,93.13 v33.53,93.09 33.57,93.13 R41.2
  Bottom 0.254: JP21.2 33.53,85.09 31.11,87.5 31.11,90.68 v33.53,93.09
5V21  (via drill 0.51)
  Top 0.254: R44.2 44.92,93.13 v44.96,93.09 45,93.13 R43.2
  Bottom 0.254: JP22.2 44.96,85.09 42.55,87.5 42.55,90.68 v44.96,93.09
5V22  (via drill 0.51)
  Top 0.254: R46.2 56.35,93.13 v56.39,93.09 56.43,93.13 R45.2
  Bottom 0.254: JP23.2 56.39,85.09 53.98,87.5 53.98,90.68 v56.39,93.09
5V23  (via drill 0.51)
  Top 0.254: R48.2 67.78,93.13 v67.82,93.09 67.86,93.13 R47.2
  Bottom 0.254: JP24.2 67.82,85.09 65.41,87.5 65.41,90.68 v67.82,93.09
5V24  (via drill 0.51)
  Top 0.254: R50.2 79.21,93.13 v79.25,93.09 79.29,93.13 R49.2
  Bottom 0.254: JP25.2 79.25,85.09 76.83,87.5 76.83,90.68 v79.25,93.09
5V25  (via drill 0.51)
  Top 0.254: R52.2 90.64,93.13 v90.68,93.09 90.72,93.13 R51.2
  Bottom 0.254: JP26.2 90.68,85.09 88.27,87.5 88.27,90.68 v90.68,93.09
5V26  (via drill 0.51)
  Top 0.254: R54.2 102.07,93.13 v102.11,93.09 102.15,93.13 R53.2
  Bottom 0.254: JP27.2 102.11,85.09 99.69,87.5 99.69,90.68 v102.11,93.09
5V27  (via drill 0.51)
  Top 0.254: R56.2 10.63,124.88 v10.67,124.84 10.71,124.88 R55.2
  Bottom 0.254: JP28.2 10.67,116.84 8.26,119.25 8.26,122.43 v10.67,124.84
5V28  (via drill 0.51)
  Top 0.254: R58.2 22.06,124.88 v22.1,124.84 22.14,124.88 R57.2
  Bottom 0.254: JP29.2 22.1,116.84 19.68,119.25 19.68,122.43 v22.1,124.84
5V29  (via drill 0.51)
  Top 0.254: R60.2 33.49,124.88 v33.53,124.84 33.57,124.88 R59.2
  Bottom 0.254: JP30.2 33.53,116.84 31.11,119.25 31.11,122.43 v33.53,124.84
5V30  (via drill 0.51)
  Top 0.254: R62.2 44.92,124.88 v44.96,124.84 45,124.88 R61.2
  Bottom 0.254: JP31.2 44.96,116.84 42.55,119.25 42.55,122.43 v44.96,124.84
5V31  (via drill 0.51)
  Top 0.254: R64.2 56.35,124.88 v56.39,124.84 56.43,124.88 R63.2
  Bottom 0.254: JP32.2 56.39,116.84 53.98,119.25 53.98,122.43 v56.39,124.84
5V32  (via drill 0.51)
  Top 0.254: R66.2 67.78,124.88 v67.82,124.84 67.86,124.88 R65.2
  Bottom 0.254: JP33.2 67.82,116.84 65.41,119.25 65.41,122.43 v67.82,124.84
5V33  (via drill 0.51)
  Top 0.254: R68.2 79.21,124.88 v79.25,124.84 79.29,124.88 R67.2
  Bottom 0.254: JP34.2 79.25,116.84 76.83,119.25 76.83,122.43 v79.25,124.84
5V34  (via drill 0.51)
  Top 0.254: R70.2 90.64,124.88 v90.68,124.84 90.72,124.88 R69.2
  Bottom 0.254: JP35.2 90.68,116.84 88.27,119.25 88.27,122.43 v90.68,124.84
5V35  (via drill 0.51)
  Top 0.254: R72.2 102.07,124.88 v102.11,124.84 102.15,124.88 R71.2
  Bottom 0.254: JP36.2 102.11,116.84 99.69,119.25 99.69,122.43 v102.11,124.84
GND  (via drill 0.51)
  Top 0.254: U1.2 10.3,35.19 11.3,36.2 13.59,36.2 13.97,35.81 13.97,32 v13.46,31.5 12.6,32.36 U1.4
  Bottom 0.254: JP1.1 13.21,23.5 13.84,24.13 13.84,31.11 v13.46,31.5
GND1  (via drill 0.51)
  Top 0.254: U2.2 21.73,35.19 22.73,36.2 25.02,36.2 25.4,35.81 25.4,32 v24.89,31.5 24.02,32.36 U2.4
  Bottom 0.254: JP2.1 24.64,23.5 25.27,24.13 25.27,31.11 v24.89,31.5
GND2  (via drill 0.51)
  Top 0.254: U3.2 33.16,35.19 34.16,36.2 36.45,36.2 36.83,35.81 36.83,32 v36.32,31.5 35.45,32.36 U3.4
  Bottom 0.254: JP3.1 36.07,23.5 36.7,24.13 36.7,31.11 v36.32,31.5
GND3  (via drill 0.51)
  Top 0.254: U4.2 44.59,35.19 45.59,36.2 47.88,36.2 48.26,35.81 48.26,32 v47.75,31.5 46.88,32.36 U4.4
  Bottom 0.254: JP4.1 47.5,23.5 48.13,24.13 48.13,31.11 v47.75,31.5
GND4  (via drill 0.51)
  Top 0.254: U5.2 56.02,35.19 57.02,36.2 59.31,36.2 59.69,35.81 59.69,32 v59.18,31.5 58.31,32.36 U5.4
  Bottom 0.254: JP5.1 58.93,23.5 59.56,24.13 59.56,31.11 v59.18,31.5
GND5  (via drill 0.51)
  Top 0.254: U6.2 67.45,35.19 68.45,36.2 70.74,36.2 71.12,35.81 71.12,32 v70.61,31.5 69.75,32.36 U6.4
  Bottom 0.254: JP6.1 70.36,23.5 70.99,24.13 70.99,31.11 v70.61,31.5
GND6  (via drill 0.51)
  Top 0.254: U7.2 78.88,35.19 79.88,36.2 82.17,36.2 82.55,35.81 82.55,32 v82.04,31.5 81.17,32.36 U7.4
  Bottom 0.254: JP7.1 81.79,23.5 82.42,24.13 82.42,31.11 v82.04,31.5
GND7  (via drill 0.51)
  Top 0.254: U8.2 90.31,35.19 91.31,36.2 93.6,36.2 93.98,35.81 93.98,32 v93.47,31.5 92.61,32.36 U8.4
  Bottom 0.254: JP8.1 93.22,23.5 93.85,24.13 93.85,31.11 v93.47,31.5
GND8  (via drill 0.51)
  Top 0.254: U9.2 101.74,35.19 102.74,36.2 105.03,36.2 105.41,35.81 105.41,32 v104.9,31.5 104.03,32.36 U9.4
  Bottom 0.254: JP9.1 104.65,23.5 105.28,24.13 105.28,31.11 v104.9,31.5
GND9  (via drill 0.51)
  Top 0.254: U10.2 10.3,66.94 11.3,67.94 13.59,67.94 13.97,67.56 13.97,63.75 v13.46,63.25 12.6,64.11 U10.4
  Bottom 0.254: JP10.1 13.21,55.24 13.84,55.88 13.84,62.87 v13.46,63.25
GND10  (via drill 0.51)
  Top 0.254: U11.2 21.73,66.94 22.73,67.94 25.02,67.94 25.4,67.56 25.4,63.75 v24.89,63.25 24.02,64.11 U11.4
  Bottom 0.254: JP11.1 24.64,55.24 25.27,55.88 25.27,62.87 v24.89,63.25
GND11  (via drill 0.51)
  Top 0.254: U12.2 33.16,66.94 34.16,67.94 36.45,67.94 36.83,67.56 36.83,63.75 v36.32,63.25 35.45,64.11 U12.4
  Bottom 0.254: JP12.1 36.07,55.24 36.7,55.88 36.7,62.87 v36.32,63.25
GND12  (via drill 0.51)
  Top 0.254: U13.2 44.59,66.94 45.59,67.94 47.88,67.94 48.26,67.56 48.26,63.75 v47.75,63.25 46.88,64.11 U13.4
  Bottom 0.254: JP13.1 47.5,55.24 48.13,55.88 48.13,62.87 v47.75,63.25
GND13  (via drill 0.51)
  Top 0.254: U14.2 56.02,66.94 57.02,67.94 59.31,67.94 59.69,67.56 59.69,63.75 v59.18,63.25 58.31,64.11 U14.4
  Bottom 0.254: JP14.1 58.93,55.24 59.56,55.88 59.56,62.87 v59.18,63.25
GND14  (via drill 0.51)
  Top 0.254: U15.2 67.45,66.94 68.45,67.94 70.74,67.94 71.12,67.56 71.12,63.75 v70.61,63.25 69.75,64.11 U15.4
  Bottom 0.254: JP15.1 70.36,55.24 70.99,55.88 70.99,62.87 v70.61,63.25
GND15  (via drill 0.51)
  Top 0.254: U16.2 78.88,66.94 79.88,67.94 82.17,67.94 82.55,67.56 82.55,63.75 v82.04,63.25 81.17,64.11 U16.4
  Bottom 0.254: JP16.1 81.79,55.24 82.42,55.88 82.42,62.87 v82.04,63.25
GND16  (via drill 0.51)
  Top 0.254: U17.2 90.31,66.94 91.31,67.94 93.6,67.94 93.98,67.56 93.98,63.75 v93.47,63.25 92.61,64.11 U17.4
  Bottom 0.254: JP17.1 93.22,55.24 93.85,55.88 93.85,62.87 v93.47,63.25
GND17  (via drill 0.51)
  Top 0.254: U18.2 101.74,66.94 102.74,67.94 105.03,67.94 105.41,67.56 105.41,63.75 v104.9,63.25 104.03,64.11 U18.4
  Bottom 0.254: JP18.1 104.65,55.24 105.28,55.88 105.28,62.87 v104.9,63.25
GND18  (via drill 0.51)
  Top 0.254: U19.2 10.3,98.69 11.3,99.69 13.59,99.69 13.97,99.31 13.97,95.5 v13.46,95 12.6,95.86 U19.4
  Bottom 0.254: JP19.1 13.21,87 13.84,87.63 13.84,94.61 v13.46,95
GND19  (via drill 0.51)
  Top 0.254: U20.2 21.73,98.69 22.73,99.69 25.02,99.69 25.4,99.31 25.4,95.5 v24.89,95 24.02,95.86 U20.4
  Bottom 0.254: JP20.1 24.64,87 25.27,87.63 25.27,94.61 v24.89,95
GND20  (via drill 0.51)
  Top 0.254: U21.2 33.16,98.69 34.16,99.69 36.45,99.69 36.83,99.31 36.83,95.5 v36.32,95 35.45,95.86 U21.4
  Bottom 0.254: JP21.1 36.07,87 36.7,87.63 36.7,94.61 v36.32,95
GND21  (via drill 0.51)
  Top 0.254: U22.2 44.59,98.69 45.59,99.69 47.88,99.69 48.26,99.31 48.26,95.5 v47.75,95 46.88,95.86 U22.4
  Bottom 0.254: JP22.1 47.5,87 48.13,87.63 48.13,94.61 v47.75,95
GND22  (via drill 0.51)
  Top 0.254: U23.2 56.02,98.69 57.02,99.69 59.31,99.69 59.69,99.31 59.69,95.5 v59.18,95 58.31,95.86 U23.4
  Bottom 0.254: JP23.1 58.93,87 59.56,87.63 59.56,94.61 v59.18,95
GND23  (via drill 0.51)
  Top 0.254: U24.2 67.45,98.69 68.45,99.69 70.74,99.69 71.12,99.31 71.12,95.5 v70.61,95 69.75,95.86 U24.4
  Bottom 0.254: JP24.1 70.36,87 70.99,87.63 70.99,94.61 v70.61,95
GND24  (via drill 0.51)
  Top 0.254: U25.2 78.88,98.69 79.88,99.69 82.17,99.69 82.55,99.31 82.55,95.5 v82.04,95 81.17,95.86 U25.4
  Bottom 0.254: JP25.1 81.79,87 82.42,87.63 82.42,94.61 v82.04,95
GND25  (via drill 0.51)
  Top 0.254: U26.2 90.31,98.69 91.31,99.69 93.6,99.69 93.98,99.31 93.98,95.5 v93.47,95 92.61,95.86 U26.4
  Bottom 0.254: JP26.1 93.22,87 93.85,87.63 93.85,94.61 v93.47,95
GND26  (via drill 0.51)
  Top 0.254: U27.2 101.74,98.69 102.74,99.69 105.03,99.69 105.41,99.31 105.41,95.5 v104.9,95 104.03,95.86 U27.4
  Bottom 0.254: JP27.1 104.65,87 105.28,87.63 105.28,94.61 v104.9,95
GND27  (via drill 0.51)
  Top 0.254: U28.2 10.3,130.44 11.3,131.44 13.59,131.44 13.97,131.06 13.97,127.25 v13.46,126.75 12.6,127.61 U28.4
  Bottom 0.254: JP28.1 13.21,118.75 13.84,119.38 13.84,126.36 v13.46,126.75
GND28  (via drill 0.51)
  Top 0.254: U29.2 21.73,130.44 22.73,131.44 25.02,131.44 25.4,131.06 25.4,127.25 v24.89,126.75 24.02,127.61 U29.4
  Bottom 0.254: JP29.1 24.64,118.75 25.27,119.38 25.27,126.36 v24.89,126.75
GND29  (via drill 0.51)
  Top 0.254: U30.2 33.16,130.44 34.16,131.44 36.45,131.44 36.83,131.06 36.83,127.25 v36.32,126.75 35.45,127.61 U30.4
  Bottom 0.254: JP30.1 36.07,118.75 36.7,119.38 36.7,126.36 v36.32,126.75
GND30  (via drill 0.51)
  Top 0.254: U31.2 44.59,130.44 45.59,131.44 47.88,131.44 48.26,131.06 48.26,127.25 v47.75,126.75 46.88,127.61 U31.4
  Bottom 0.254: JP31.1 47.5,118.75 48.13,119.38 48.13,126.36 v47.75,126.75
GND31  (via drill 0.51)
  Top 0.254: U32.2 56.02,130.44 57.02,131.44 59.31,131.44 59.69,131.06 59.69,127.25 v59.18,126.75 58.31,127.61 U32.4
  Bottom 0.254: JP32.1 58.93,118.75 59.56,119.38 59.56,126.36 v59.18,126.75
GND32  (via drill 0.51)
  Top 0.254: U33.2 67.45,130.44 68.45,131.44 70.74,131.44 71.12,131.06 71.12,127.25 v70.61,126.75 69.75,127.61 U33.4
  Bottom 0.254: JP33.1 70.36,118.75 70.99,119.38 70.99,126.36 v70.61,126.75
GND33  (via drill 0.51)
  Top 0.254: U34.2 78.88,130.44 79.88,131.44 82.17,131.44 82.55,131.06 82.55,127.25 v82.04,126.75 81.17,127.61 U34.4
  Bottom 0.254: JP34.1 81.79,118.75 82.42,119.38 82.42,126.36 v82.04,126.75
GND34  (via drill 0.51)
  Top 0.254: U35.2 90.31,130.44 91.31,131.44 93.6,131.44 93.98,131.06 93.98,127.25 v93.47,126.75 92.61,127.61 U35.4
  Bottom 0.254: JP35.1 93.22,118.75 93.85,119.38 93.85,126.36 v93.47,126.75
GND35  (via drill 0.51)
  Top 0.254: U36.2 101.74,130.44 102.74,131.44 105.03,131.44 105.41,131.06 105.41,127.25 v104.9,126.75 104.03,127.61 U36.4
  Bottom 0.254: JP36.1 104.65,118.75 105.28,119.38 105.28,126.36 v104.9,126.75
N$1
  Top 0.254: U1.1 11.57,35.19 10.67,34.29 10.67,31.75 11.09,31.33 R1.1
N$2  (via drill 0.51)
  Top 0.254: v7.75,30.48 8.6,31.33 R2.1 9.4,31.88 8.74,32.53 U1.3
  Bottom 0.254: JP1.3 8.13,21.72 7.75,22.1 v7.75,30.48
N$3
  Top 0.254: U2.1 23,35.19 22.1,34.29 22.1,31.75 22.52,31.33 R3.1
N$4  (via drill 0.51)
  Top 0.254: v19.18,30.48 20.03,31.33 R4.1 20.83,31.88 20.17,32.53 U2.3
  Bottom 0.254: JP2.3 19.56,21.72 19.18,22.1 v19.18,30.48
N$5
  Top 0.254: U3.1 34.43,35.19 33.53,34.29 33.53,31.75 33.95,31.33 R5.1
N$6  (via drill 0.51)
  Top 0.254: v30.61,30.48 31.46,31.33 R6.1 32.26,31.88 31.6,32.53 U3.3
  Bottom 0.254: JP3.3 30.99,21.72 30.61,22.1 v30.61,30.48
N$7
  Top 0.254: U4.1 45.86,35.19 44.96,34.29 44.96,31.75 45.38,31.33 R7.1
N$8  (via drill 0.51)
  Top 0.254: v42.04,30.48 42.89,31.33 R8.1 43.69,31.88 43.03,32.53 U4.3
  Bottom 0.254: JP4.3 42.42,21.72 42.04,22.1 v42.04,30.48
N$9
  Top 0.254: U5.1 57.29,35.19 56.39,34.29 56.39,31.75 56.81,31.33 R9.1
N$10  (via drill 0.51)
  Top 0.254: v53.47,30.48 54.32,31.33 R10.1 55.12,31.88 54.46,32.53 U5.3
  Bottom 0.254: JP5.3 53.85,21.72 53.47,22.1 v53.47,30.48
N$11
  Top 0.254: U6.1 68.72,35.19 67.82,34.29 67.82,31.75 68.24,31.33 R11.1
N$12  (via drill 0.51)
  Top 0.254: v64.9,30.48 65.75,31.33 R12.1 66.55,31.88 65.89,32.53 U6.3
  Bottom 0.254: JP6.3 65.28,21.72 64.9,22.1 v64.9,30.48
N$13
  Top 0.254: U7.1 80.15,35.19 79.25,34.29 79.25,31.75 79.67,31.33 R13.1
N$14  (via drill 0.51)
  Top 0.254: v76.33,30.48 77.18,31.33 R14.1 77.98,31.88 77.32,32.53 U7.3
  Bottom 0.254: JP7.3 76.71,21.72 76.33,22.1 v76.33,30.48
N$15
  Top 0.254: U8.1 91.58,35.19 90.68,34.29 90.68,31.75 91.1,31.33 R15.1
N$16  (via drill 0.51)
  Top 0.254: v87.76,30.48 88.61,31.33 R16.1 89.41,31.88 88.75,32.53 U8.3
  Bottom 0.254: JP8.3 88.14,21.72 87.76,22.1 v87.76,30.48
N$17
  Top 0.254: U9.1 103.01,35.19 102.11,34.29 102.11,31.75 102.53,31.33 R17.1
N$18  (via drill 0.51)
  Top 0.254: v99.19,30.48 100.04,31.33 R18.1 100.84,31.88 100.18,32.53 U9.3
  Bottom 0.254: JP9.3 99.57,21.72 99.19,22.1 v99.19,30.48
N$19
  Top 0.254: U10.1 11.57,66.94 10.67,66.04 10.67,63.5 11.09,63.08 R19.1
N$20  (via drill 0.51)
  Top 0.254: v7.75,62.23 8.6,63.08 R20.1 9.4,63.63 8.74,64.28 U10.3
  Bottom 0.254: JP10.3 8.13,53.47 7.75,53.85 v7.75,62.23
N$21
  Top 0.254: U11.1 23,66.94 22.1,66.04 22.1,63.5 22.52,63.08 R21.1
N$22  (via drill 0.51)
  Top 0.254: v19.18,62.23 20.03,63.08 R22.1 20.83,63.63 20.17,64.28 U11.3
  Bottom 0.254: JP11.3 19.56,53.47 19.18,53.85 v19.18,62.23
N$23
  Top 0.254: U12.1 34.43,66.94 33.53,66.04 33.53,63.5 33.95,63.08 R23.1
N$24  (via drill 0.51)
  Top 0.254: v30.61,62.23 31.46,63.08 R24.1 32.26,63.63 31.6,64.28 U12.3
  Bottom 0.254: JP12.3 30.99,53.47 30.61,53.85 v30.61,62.23
N$25
  Top 0.254: U13.1 45.86,66.94 44.96,66.04 44.96,63.5 45.38,63.08 R25.1
N$26  (via drill 0.51)
  Top 0.254: v42.04,62.23 42.89,63.08 R26.1 43.69,63.63 43.03,64.28 U13.3
  Bottom 0.254: JP13.3 42.42,53.47 42.04,53.85 v42.04,62.23
N$27
  Top 0.254: U14.1 57.29,66.94 56.39,66.04 56.39,63.5 56.81,63.08 R27.1
N$28  (via drill 0.51)
  Top 0.254: v53.47,62.23 54.32,63.08 R28.1 55.12,63.63 54.46,64.28 U14.3
  Bottom 0.254: JP14.3 53.85,53.47 53.47,53.85 v53.47,62.23
N$29
  Top 0.254: U15.1 68.72,66.94 67.82,66.04 67.82,63.5 68.24,63.08 R29.1
N$30  (via drill 0.51)
  Top 0.254: v64.9,62.23 65.75,63.08 R30.1 66.55,63.63 65.89,64.28 U15.3
  Bottom 0.254: JP15.3 65.28,53.47 64.9,53.85 v64.9,62.23
N$31
  Top 0.254: U16.1 80.15,66.94 79.25,66.04 79.25,63.5 79.67,63.08 R31.1
N$32  (via drill 0.51)
  Top 0.254: v76.33,62.23 77.18,63.08 R32.1 77.98,63.63 77.32,64.28 U16.3
  Bottom 0.254: JP16.3 76.71,53.47 76.33,53.85 v76.33,62.23
N$33
  Top 0.254: U17.1 91.58,66.94 90.68,66.04 90.68,63.5 91.1,63.08 R33.1
N$34  (via drill 0.51)
  Top 0.254: v87.76,62.23 88.61,63.08 R34.1 89.41,63.63 88.75,64.28 U17.3
  Bottom 0.254: JP17.3 88.14,53.47 87.76,53.85 v87.76,62.23
N$35
  Top 0.254: U18.1 103.01,66.94 102.11,66.04 102.11,63.5 102.53,63.08 R35.1
N$36  (via drill 0.51)
  Top 0.254: v99.19,62.23 100.04,63.08 R36.1 100.84,63.63 100.18,64.28 U18.3
  Bottom 0.254: JP18.3 99.57,53.47 99.19,53.85 v99.19,62.23
N$37
  Top 0.254: U19.1 11.57,98.69 10.67,97.79 10.67,95.25 11.09,94.83 R37.1
N$38  (via drill 0.51)
  Top 0.254: v7.75,93.98 8.6,94.83 R38.1 9.4,95.38 8.74,96.03 U19.3
  Bottom 0.254: JP19.3 8.13,85.22 7.75,85.6 v7.75,93.98
N$39
  Top 0.254: U20.1 23,98.69 22.1,97.79 22.1,95.25 22.52,94.83 R39.1
N$40  (via drill 0.51)
  Top 0.254: v19.18,93.98 20.03,94.83 R40.1 20.83,95.38 20.17,96.03 U20.3
  Bottom 0.254: JP20.3 19.56,85.22 19.18,85.6 v19.18,93.98
N$41
  Top 0.254: U21.1 34.43,98.69 33.53,97.79 33.53,95.25 33.95,94.83 R41.1
N$42  (via drill 0.51)
  Top 0.254: v30.61,93.98 31.46,94.83 R42.1 32.26,95.38 31.6,96.03 U21.3
  Bottom 0.254: JP21.3 30.99,85.22 30.61,85.6 v30.61,93.98
N$43
  Top 0.254: U22.1 45.86,98.69 44.96,97.79 44.96,95.25 45.38,94.83 R43.1
N$44  (via drill 0.51)
  Top 0.254: v42.04,93.98 42.89,94.83 R44.1 43.69,95.38 43.03,96.03 U22.3
  Bottom 0.254: JP22.3 42.42,85.22 42.04,85.6 v42.04,93.98
N$45
  Top 0.254: U23.1 57.29,98.69 56.39,97.79 56.39,95.25 56.81,94.83 R45.1
N$46  (via drill 0.51)
  Top 0.254: v53.47,93.98 54.32,94.83 R46.1 55.12,95.38 54.46,96.03 U23.3
  Bottom 0.254: JP23.3 53.85,85.22 53.47,85.6 v53.47,93.98
N$47
  Top 0.254: U24.1 68.72,98.69 67.82,97.79 67.82,95.25 68.24,94.83 R47.1
N$48  (via drill 0.51)
  Top 0.254: v64.9,93.98 65.75,94.83 R48.1 66.55,95.38 65.89,96.03 U24.3
  Bottom 0.254: JP24.3 65.28,85.22 64.9,85.6 v64.9,93.98
N$49
  Top 0.254: U25.1 80.15,98.69 79.25,97.79 79.25,95.25 79.67,94.83 R49.1
N$50  (via drill 0.51)
  Top 0.254: v76.33,93.98 77.18,94.83 R50.1 77.98,95.38 77.32,96.03 U25.3
  Bottom 0.254: JP25.3 76.71,85.22 76.33,85.6 v76.33,93.98
N$51
  Top 0.254: U26.1 91.58,98.69 90.68,97.79 90.68,95.25 91.1,94.83 R51.1
N$52  (via drill 0.51)
  Top 0.254: v87.76,93.98 88.61,94.83 R52.1 89.41,95.38 88.75,96.03 U26.3
  Bottom 0.254: JP26.3 88.14,85.22 87.76,85.6 v87.76,93.98
N$53
  Top 0.254: U27.1 103.01,98.69 102.11,97.79 102.11,95.25 102.53,94.83 R53.1
N$54  (via drill 0.51)
  Top 0.254: v99.19,93.98 100.04,94.83 R54.1 100.84,95.38 100.18,96.03 U27.3
  Bottom 0.254: JP27.3 99.57,85.22 99.19,85.6 v99.19,93.98
N$55
  Top 0.254: U28.1 11.57,130.44 10.67,129.54 10.67,127 11.09,126.58 R55.1
N$56  (via drill 0.51)
  Top 0.254: v7.75,125.73 8.6,126.58 R56.1 9.4,127.13 8.74,127.78 U28.3
  Bottom 0.254: JP28.3 8.13,116.97 7.75,117.35 v7.75,125.73
N$57
  Top 0.254: U29.1 23,130.44 22.1,129.54 22.1,127 22.52,126.58 R57.1
N$58  (via drill 0.51)
  Top 0.254: v19.18,125.73 20.03,126.58 R58.1 20.83,127.13 20.17,127.78 U29.3
  Bottom 0.254: JP29.3 19.56,116.97 19.18,117.35 v19.18,125.73
N$59
  Top 0.254: U30.1 34.43,130.44 33.53,129.54 33.53,127 33.95,126.58 R59.1
N$60  (via drill 0.51)
  Top 0.254: v30.61,125.73 31.46,126.58 R60.1 32.26,127.13 31.6,127.78 U30.3
  Bottom 0.254: JP30.3 30.99,116.97 30.61,117.35 v30.61,125.73
N$61
  Top 0.254: U31.1 45.86,130.44 44.96,129.54 44.96,127 45.38,126.58 R61.1
N$62  (via drill 0.51)
  Top 0.254: v42.04,125.73 42.89,126.58 R62.1 43.69,127.13 43.03,127.78 U31.3
  Bottom 0.254: JP31.3 42.42,116.97 42.04,117.35 v42.04,125.73
N$63
  Top 0.254: U32.1 57.29,130.44 56.39,129.54 56.39,127 56.81,126.58 R63.1
N$64  (via drill 0.51)
  Top 0.254: v53.47,125.73 54.32,126.58 R64.1 55.12,127.13 54.46,127.78 U32.3
  Bottom 0.254: JP32.3 53.85,116.97 53.47,117.35 v53.47,125.73
N$65
  Top 0.254: U33.1 68.72,130.44 67.82,129.54 67.82,127 68.24,126.58 R65.1
N$66  (via drill 0.51)
  Top 0.254: v64.9,125.73 65.75,126.58 R66.1 66.55,127.13 65.89,127.78 U33.3
  Bottom 0.254: JP33.3 65.28,116.97 64.9,117.35 v64.9,125.73
N$67
  Top 0.254: U34.1 80.15,130.44 79.25,129.54 79.25,127 79.67,126.58 R67.1
N$68  (via drill 0.51)
  Top 0.254: v76.33,125.73 77.18,126.58 R68.1 77.98,127.13 77.32,127.78 U34.3
  Bottom 0.254: JP34.3 76.71,116.97 76.33,117.35 v76.33,125.73
N$69
  Top 0.254: U35.1 91.58,130.44 90.68,129.54 90.68,127 91.1,126.58 R69.1
N$70  (via drill 0.51)
  Top 0.254: v87.76,125.73 88.61,126.58 R70.1 89.41,127.13 88.75,127.78 U35.3
  Bottom 0.254: JP35.3 88.14,116.97 87.76,117.35 v87.76,125.73
N$71
  Top 0.254: U36.1 103.01,130.44 102.11,129.54 102.11,127 102.53,126.58 R71.1
N$72  (via drill 0.51)
  Top 0.254: v99.19,125.73 100.04,126.58 R72.1 100.84,127.13 100.18,127.78 U36.3
  Bottom 0.254: JP36.3 99.57,116.97 99.19,117.35 v99.19,125.73

## Text on the board
Bottom: v11 | v11 | v11 | v11 | v11 | v11 | v11 | v11 | v11 | v11 | v11 | v11 | v11 | v11 | v11 | v11 | v11 | v11 | v11 | v11 | v11 | v11 | v11 | v11 | v11 | v11 | v11 | v11 | v11 | v11 | v11 | v11 | v11 | v11 | v11 | v11
tPlace: QRE1113 / Analog / Line / Sensor | QRE1113 / Analog / Line / Sensor | QRE1113 / Analog / Line / Sensor | QRE1113 / Analog / Line / Sensor | QRE1113 / Analog / Line / Sensor | QRE1113 / Analog / Line / Sensor | QRE1113 / Analog / Line / Sensor | QRE1113 / Analog / Line / Sensor | QRE1113 / Analog / Line / Sensor | OUT | VCC | GND | OUT | VCC | GND | OUT | VCC | GND | OUT | VCC | GND | OUT | VCC | GND | OUT | VCC | GND | OUT | VCC | GND | OUT | VCC | GND | OUT | VCC | GND | QRE1113 / Analog / Line / Sensor | QRE1113 / Analog / Line / Sensor | QRE1113 / Analog / Line / Sensor | QRE1113 / Analog / Line / Sensor | QRE1113 / Analog / Line / Sensor | QRE1113 / Analog / Line / Sensor | QRE1113 / Analog / Line / Sensor | QRE1113 / Analog / Line / Sensor | QRE1113 / Analog / Line / Sensor | OUT | VCC | GND | OUT | VCC | GND | OUT | VCC | GND | OUT | VCC | GND | OUT | VCC | GND | OUT | VCC | GND | OUT | VCC | GND | OUT | VCC | GND | OUT | VCC | GND | QRE1113 / Analog / Line / Sensor | QRE1113 / Analog / Line / Sensor | QRE1113 / Analog / Line / Sensor | QRE1113 / Analog / Line / Sensor | QRE1113 / Analog / Line / Sensor | QRE1113 / Analog / Line / Sensor | QRE1113 / Analog / Line / Sensor | QRE1113 / Analog / Line / Sensor | QRE1113 / Analog / Line / Sensor | OUT | VCC | GND | OUT | VCC | GND | OUT | VCC | GND | OUT | VCC | GND | OUT | VCC | GND | OUT | VCC | GND | OUT | VCC | GND | OUT | VCC | GND | OUT | VCC | GND | QRE1113 / Analog / Line / Sensor | QRE1113 / Analog / Line / Sensor | QRE1113 / Analog / Line / Sensor | QRE1113 / Analog / Line / Sensor | QRE1113 / Analog / Line / Sensor | QRE1113 / Analog / Line / Sensor | QRE1113 / Analog / Line / Sensor | QRE1113 / Analog / Line / Sensor | QRE1113 / Analog / Line / Sensor | OUT | VCC | GND | OUT | VCC | GND | OUT | VCC | GND | OUT | VCC | GND | OUT | VCC | GND | OUT | VCC | GND | OUT | VCC | GND | OUT | VCC | GND | OUT | VCC | GND
bPlace: OUT | VCC | GND | OUT | VCC | GND | OUT | VCC | GND | OUT | VCC | GND | OUT | VCC | GND | OUT | VCC | GND | OUT | VCC | GND | OUT | VCC | GND | OUT | VCC | GND | OUT | VCC | GND | OUT | VCC | GND | OUT | VCC | GND | OUT | VCC | GND | OUT | VCC | GND | OUT | VCC | GND | OUT | VCC | GND | OUT | VCC | GND | OUT | VCC | GND | OUT | VCC | GND | OUT | VCC | GND | OUT | VCC | GND | OUT | VCC | GND | OUT | VCC | GND | OUT | VCC | GND | OUT | VCC | GND | OUT | VCC | GND | OUT | VCC | GND | OUT | VCC | GND | OUT | VCC | GND | OUT | VCC | GND | OUT | VCC | GND | OUT | VCC | GND | OUT | VCC | GND | OUT | VCC | GND | OUT | VCC | GND | OUT | VCC | GND